# Altium PCB PCB1.PcbDoc (part 1 of 2)
Units mil, origin at the board's own origin, x right, y up, seen from the top; angles counter-clockwise.
Board outline 3551.03 x 3776.23 mil, 2 copper layers (Top Layer, Bottom Layer); 216 components, 234 nets, 1586 pads, 0 vias.
Unrouted connection lines stored in the file: 528.
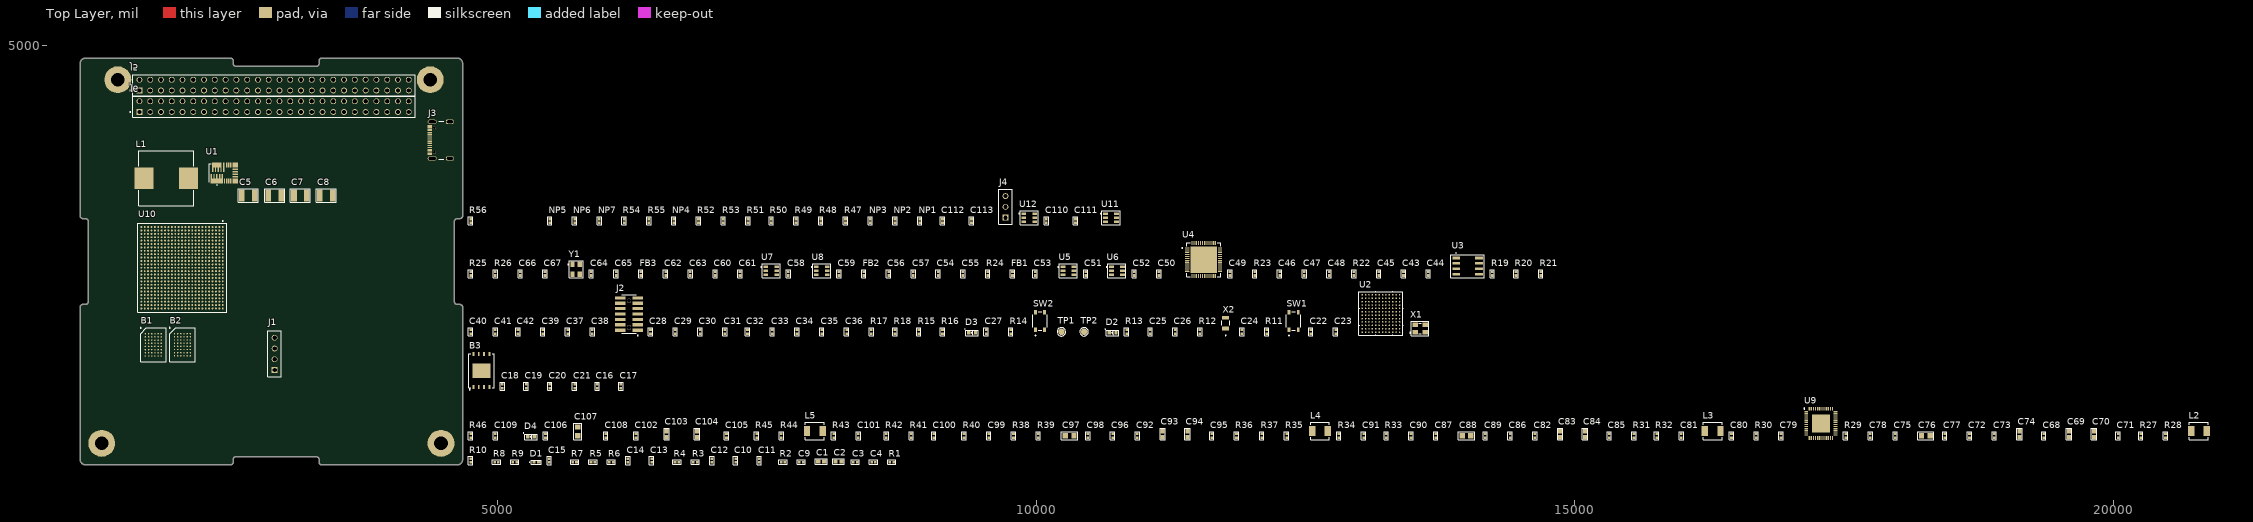
[diagram p0: Top Layer view]
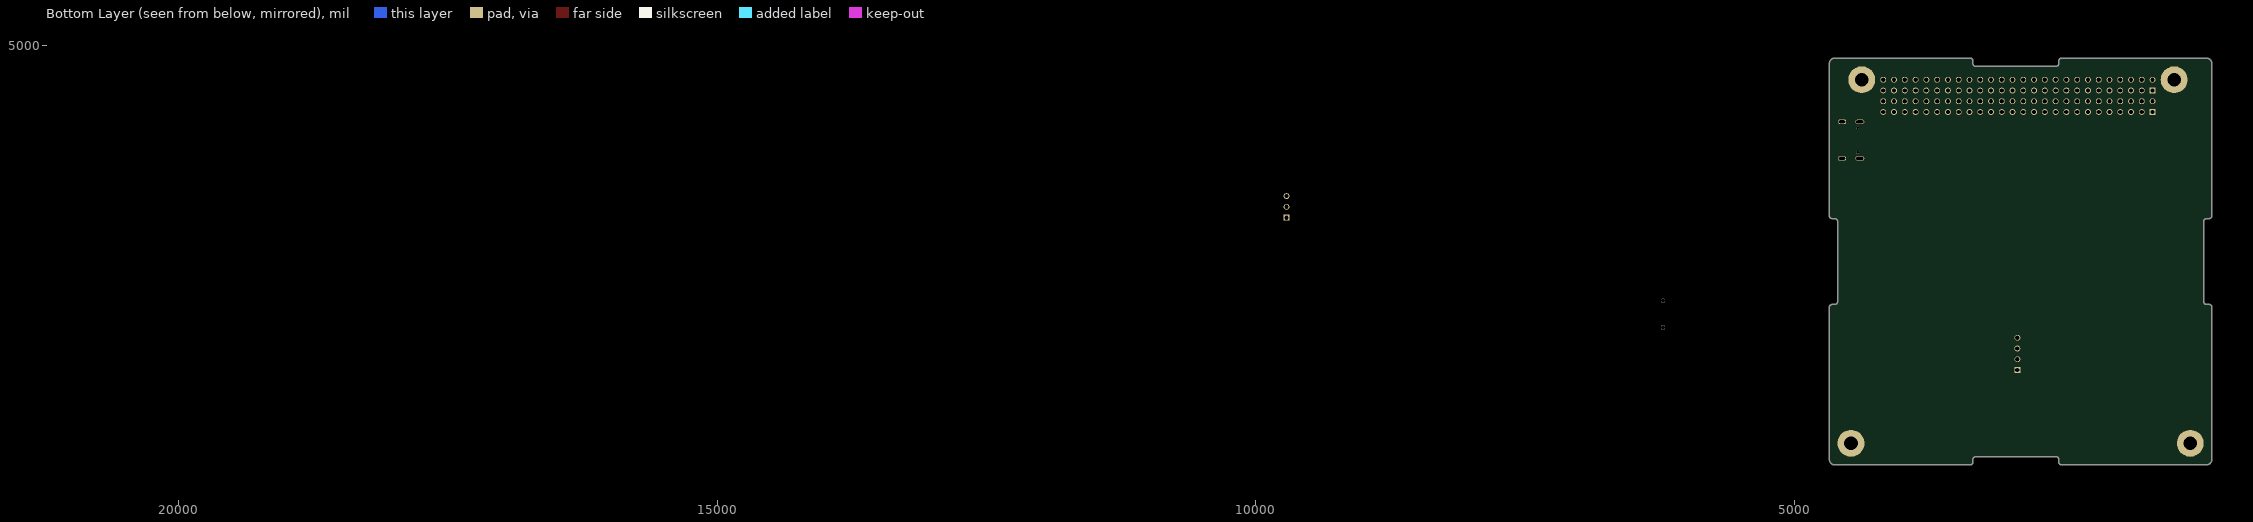
[diagram p1: Bottom Layer view, seen from below]

## Layer stack, top to bottom
Top Solder: solder mask 0.4, Solder Resist, Dk 3.5
Top Layer: signal copper 1.4
Dielectric 1: dielectric 12.6, FR-4, Dk 4.8
Bottom Layer: signal copper 1.4
Bottom Solder: solder mask 0.4, Solder Resist, Dk 3.5

## Board outline
1124.48,1154.99 ccw(c1175,1155) 1175,1104.48 1236.42,1104.48 2519.54,1104.48 2519.7,1104.51 ccw(c2519.54,1130.56) 2545.59,1130.56 2545.59,1155.03 cw(c2570.67,1155.03) 2570.67,1180.1 3317.52,1180.1 cw(c3317.52,1155.03) 3342.6,1155.03 3342.6,1130.56 ccw(c3368.65,1130.56) 3368.49,1104.51 3368.65,1104.49 4625,1104.48 ccw(c4625,1155) 4675.52,1155 4675.51,2568.04 4675.49,2568.2 ccw(c4649.44,2568.04) 4649.44,2594.1 4624.97,2594.1 cw(c4624.97,2619.17) 4599.9,2619.17 4599.9,3366.02 cw(c4624.97,3366.02) 4624.97,3391.1 4649.44,3391.1 ccw(c4649.44,3417.15) 4675.49,3416.99 4675.51,3417.15 4675.52,4830.2 ccw(c4625,4830.2) 4625,4880.71 3368.65,4880.71 3368.49,4880.69 ccw(c3368.65,4854.63) 3342.6,4854.63 3342.6,4830.17 cw(c3317.52,4830.17) 3317.52,4805.1 2570.67,4805.1 cw(c2570.67,4830.17) 2545.59,4830.17 2545.59,4854.63 ccw(c2519.54,4854.63) 2519.7,4880.69 2519.54,4880.71 1175,4880.71 ccw(c1175,4830.2) 1124.48,4830.2 1124.48,3417.15 1124.48,3417.14 ccw(c1150.54,3417.15) 1150.54,3391.1 1175,3391.1 cw(c1175,3366.02) 1200.08,3366.02 1200.08,2619.17 cw(c1175,2619.17) 1175,2594.1 1150.54,2594.1 ccw(c1150.54,2568.04) 1124.49,2568.04

## Design rules (kind name [scope] priority, off if disabled: settings)
Clearance [All] p1: gap=10 ignorepadtopadclearanceinfootprint=FALSE
DiffPairsRouting [All] p1: maxlimit=10 minlimit=10 mostfreqgap=10 toplayer_minwidth=15 toplayer_maxwidth=15 toplayer_prefwidth=15 bottomlayer_minwidth=15 bottomlayer_maxwidth=15 bottomlayer_prefwidth=15 maxuncoupledlength=500
PolygonConnect [All] p1: connectstyle=Relief reliefconductorwidth=10 reliefentries=4 polygonreliefangle="90 Angle" airgapwidth=10
RoutingVias [All] p1: holewidth=28 width=50 viastyle="Through Hole" minholewidth=28 minwidth=50 maxholewidth=28 maxwidth=50
SolderMaskExpansion [All] p1: expansion=0 istentingtop=FALSE
SupplyNets "Schematic Supply Nets_22" [InNet('3.3V_FPGA')] p1: voltage=0.000
SupplyNets "Schematic Supply Nets_21" [InNet('VCC_3.3V')] p2: voltage=0.000
SupplyNets "Schematic Supply Nets_20" [InNet('+5V_CSKB')] p3: voltage=0.000
SupplyNets "Schematic Supply Nets_19" [InNet('VCCINT_1V')] p4: voltage=0.000
SupplyNets "Schematic Supply Nets_18" [InNet('AGND')] p5: voltage=0.000
SupplyNets "Schematic Supply Nets_16" [InNet('VDDDG')] p6: voltage=0.000
SupplyNets "Schematic Supply Nets_15" [InNet('FT232_VPHY_3.3V')] p7: voltage=0.000
SupplyNets "Schematic Supply Nets_14" [InNet('5V')] p8: voltage=0.000
SupplyNets "Schematic Supply Nets_13" [InNet('FT232_VCCD_3.3V')] p9: voltage=0.000
SupplyNets "Schematic Supply Nets_12" [InNet('VDDD')] p10: voltage=0.000
SupplyNets "Schematic Supply Nets_11" [InNet('FT232_VCORE_1.8V')] p11: voltage=0.000
SupplyNets "Schematic Supply Nets_10" [InNet('PD_BUS')] p12: voltage=0.000
SupplyNets "Schematic Supply Nets_9" [InNet('FT232_VCCA_1.8V')] p13: voltage=0.000
SupplyNets "Schematic Supply Nets_8" [InNet('GND')] p14: voltage=0.000
SupplyNets "Schematic Supply Nets_7" [InNet('VDDDA')] p15: voltage=0.000
SupplyNets "Schematic Supply Nets_6" [InNet('1V2_DDR')] p16: voltage=0.000
SupplyNets "Schematic Supply Nets_5" [InNet('FT232_VPLL_3.3V')] p17: voltage=0.000
SupplyNets "Schematic Supply Nets_3" [InNet('1.8V')] p18: voltage=0.000
SupplyNets "Schematic Supply Nets_2" [InNet('2V5_DDR')] p19: voltage=0.000
SupplyNets "Schematic Supply Nets_1" [InNet('3.3V')] p20: voltage=0.000
SupplyNets "Schematic Supply Nets" [InNet('FT232_VREGIN_5V')] p21: voltage=0.000
Width [All] p1: maxlimit=10 minlimit=10 preferedwidth=10
29 further rules are at their usual default settings.

## Classes and differential pairs
net class MCU_D[15..0]: MCU_D0 MCU_D1 MCU_D2 MCU_D3 MCU_D4 MCU_D5 MCU_D6 MCU_D7 MCU_D8 MCU_D9 MCU_D10 MCU_D11 MCU_D12 MCU_D13 MCU_D14 MCU_D15
net class MCU_A[20..0]: MCU_A0 MCU_A1 MCU_A2 MCU_A3 MCU_A4 MCU_A5 MCU_A6 MCU_A7 MCU_A8 MCU_A9 MCU_A10 MCU_A11 MCU_A12 MCU_A13 MCU_A14 MCU_A15 MCU_A16 MCU_A17 MCU_A18 MCU_A19 MCU_A20
net class SRAM_D[31..0]: SRAM_D0 SRAM_D1 SRAM_D2 SRAM_D3 SRAM_D4 SRAM_D5 SRAM_D6 SRAM_D7 SRAM_D8 SRAM_D9 SRAM_D10 SRAM_D11 SRAM_D12 SRAM_D13 SRAM_D14 SRAM_D15 SRAM_D16 SRAM_D17 SRAM_D18 SRAM_D19 SRAM_D20 SRAM_D21 SRAM_D22 SRAM_D23 SRAM_D24 SRAM_D25 SRAM_D26 SRAM_D27 SRAM_D28 SRAM_D29 SRAM_D30 SRAM_D31
net class SRAM_A[20..0]: SRAM_A0 SRAM_A1 SRAM_A2 SRAM_A3 SRAM_A4 SRAM_A5 SRAM_A6 SRAM_A7 SRAM_A8 SRAM_A9 SRAM_A10 SRAM_A11 SRAM_A12 SRAM_A13 SRAM_A14 SRAM_A15 SRAM_A16 SRAM_A17 SRAM_A18 SRAM_A19 SRAM_A20
net class FLASH_IO[3..0]: FLASH_IO0 FLASH_IO1 FLASH_IO2 FLASH_IO3
component class "07 - CONNECTOR_CSKB": C110 C111 C112 C113 J4 J5 J6 NP1 NP2 NP3 NP4 NP5 NP6 NP7 R47 R48 R49 R50 R51 R52 R53 R54 R55 R56 U11 U12
component class "06 - JTAG": C43 C44 C45 C46 C47 C48 C49 C50 C51 C52 C53 C54 C55 C56 C57 C58 C59 C60 C61 C62 C63 C64 C65 C66 C67 FB1 FB2 FB3 J3 R19 R20 R21 R22 R23 R24 R25 R26 U3 U4 U5 U6 U7 U8 Y1
component class "05 - MCU": C22 C23 C24 C25 C26 C27 C28 C29 C30 C31 C32 C33 C34 C35 C36 C37 C38 C39 C40 C41 C42 D2 D3 J1 J2 R11 R12 R13 R14 R15 R16 R17 R18 SW1 SW2 TP1 TP2 U2 X1 X2
component class "04 - SRAM_FLASH": B1 B2 B3 C16 C17 C18 C19 C20 C21
component class "03 - FPGA_POWER": U10
component class "02 - AUX_POWER_SUPPLIES": C68 C69 C70 C71 C72 C73 C74 C75 C76 C77 C78 C79 C80 C81 C82 C83 C84 C85 C86 C87 C88 C89 C90 C91 C92 C93 C94 C95 C96 C97 C98 C99 C100 C101 C102 C103 C104 C105 C106 C107 C108 C109 D4 L2 L3 L4 L5 R27 R28 R29 R30 R31 R32 R33 R34 R35 R36 R37 R38 R39 R40 R41 R42 R43 R44 R45 R46 U9
component class "01 - POWER SUPPLY": C1 C2 C3 C4 C5 C6 C7 C8 C9 C10 C11 C12 C13 C14 C15 D1 L1 R1 R2 R3 R4 R5 R6 R7 R8 R9 R10 U1
differential pair USB: +USB_P -USB_N

## Components (designator, comment, footprint, x,y, rotation, side; value= is the part's Value field where it differs from the comment)
B1 "IS61WV204816ALL-12BLI" BGA48C75P6X8_600X800X120 1804.29,2218.82 r0 top
B2 "IS61WV204816ALL-12BLI" BGA48C75P6X8_600X800X120 2074.29,2219.76 r0 top
B3 "W25N02KVZEIR" SON127P800X600X80-9N 4850,1980 r90 top
C1 "CAP SMD 0603 10uF 10V ±10%" 0603-C-R 8005,1135 r0 top value=10uF
C2 "CAP SMD 0603 10uF 10V ±10%" 0603-C-R 8165,1135 r0 top value=10uF
C3 "GRM155R61E105KA12D" 0402-C-R 8320,1130 r0 top value=1uF
C4 "GRM155R71C104KA88J" 0402-C-R 8490,1130 r0 top
C5 "GRT32EC70J107ME13L" 1210-C-R 2685,3605 r0 top value=100uF
C6 "GRT32EC70J107ME13L" 1210-C-R 2930,3605 r0 top value=100uF
C7 "GRT32EC70J107ME13L" 1210-C-R 3170,3605 r0 top value=100uF
C8 "GRT32EC70J107ME13L" 1210-C-R 3410,3605 r0 top value=100uF
C9 "CGA2B1X7S1C474K050BC" 0402-C-R 7820,1130 r0 top
C10 "GRM155D81C475ME15J" 0402-C-R 7210,1145 r90 top value=4.7uF
C11 "GRM155R71C104KA88J" 0402-C-R 7430,1145 r90 top
C12 "JMK105BJ105KV-F" 0402-C-R 6990,1145 r90 top value=1uF
C13 "GRM155R71C103KA01D" 0402-C-R 6430,1145 r90 top value=0.01uF
C14 "GRM155R71C104KA88J" 0402-C-R 6210,1145 r90 top
C15 "GRM155R71C103KA01D" 0402-C-R 5480,1145 r90 top value=0.01uF
C16 "CAP CER 10UF 6.3V X5R 0402" 0402-C-R 5925,1835 r90 top
C17 "GRM155R71C104KA88J" 0402-C-R 6145,1835 r90 top
C18 "CAP CER 10UF 6.3V X5R 0402" 0402-C-R 5045,1835 r90 top
C19 "GRM155R71C104KA88J" 0402-C-R 5265,1835 r90 top
C20 "CAP CER 10UF 6.3V X5R 0402" 0402-C-R 5485,1835 r90 top
C21 "GRM155R71C104KA88J" 0402-C-R 5715,1835 r90 top
C22 "GRM0225C1E6R8CA03L" 0402-C-R 12550,2340 r90 top value=6.8pF
C23 "GRM0225C1E6R8CA03L" 0402-C-R 12780,2340 r90 top value=6.8pF
C24 "GRM155R61E104KA87D" 0402-C-R 11910,2340 r90 top value=0.1uF
C25 "CC0402BRNPO9BN5R6" 0402-C-R 11060,2340 r90 top value=5.6pF
C26 "CC0402BRNPO9BN5R6" 0402-C-R 11290,2340 r90 top value=5.6pF
C27 "GRM155R61E104KA87D" 0402-C-R 9535,2340 r90 top value=0.1uF
C28 "GRM155R61E104KA87D" 0402-C-R 6420,2340 r90 top value=0.1uF
C29 "GRM155R61E104KA87D" 0402-C-R 6650,2340 r90 top value=0.1uF
C30 "GRM155R61E104KA87D" 0402-C-R 6880,2340 r90 top value=0.1uF
C31 "GRM155R61E104KA87D" 0402-C-R 7110,2340 r90 top value=0.1uF
C32 "GRM155R61E104KA87D" 0402-C-R 7320,2340 r90 top value=0.1uF
C33 "GRM155R61E104KA87D" 0402-C-R 7550,2340 r90 top value=0.1uF
C34 "GRM155R61E104KA87D" 0402-C-R 7780,2340 r90 top value=0.1uF
C35 "GRM155R61E104KA87D" 0402-C-R 8010,2340 r90 top value=0.1uF
C36 "GRM155D81C475ME15J" 0402-C-R 8240,2340 r90 top value=4.7uF
C37 "GRM155R61E104KA87D" 0402-C-R 5650,2340 r90 top value=0.1uF
C38 "JMK105BJ105KV-F" 0402-C-R 5880,2340 r90 top value=1uF
C39 "885012105013" 0402-C-R 5420,2340 r90 top value=2.2uF
C40 "GRM155R61E104KA87D" 0402-C-R 4750,2340 r90 top value=0.1uF
C41 "JMK105BJ105KV-F" 0402-C-R 4980,2340 r90 top value=1uF
C42 "KGM05AR71E103KH" 0402-C-R 5190,2340 r90 top value=10nF
C43 "GRM155R61E104KA87D" 0402-C-R 13410,2880 r90 top value=0.1uF
C44 "GRM155D81C475ME15J" 0402-C-R 13640,2880 r90 top value=4.7uF
C45 "GRM155R61E104KA87D" 0402-C-R 13180,2880 r90 top value=0.1uF
C46 "GRM155R61E104KA87D" 0402-C-R 12260,2880 r90 top value=0.1uF
C47 "GRM155R61E104KA87D" 0402-C-R 12490,2880 r90 top value=0.1uF
C48 "GRM155R61E104KA87D" 0402-C-R 12720,2880 r90 top value=0.1uF
C49 "GRM155R61E104KA87D" 0402-C-R 11800,2880 r90 top value=0.1uF
C50 "KGM05AR71E103KH" 0402-C-R 11140,2880 r90 top value=10nF
C51 "GRM155R61E104KA87D" 0402-C-R 10460,2880 r90 top value=0.1uF
C52 "GRM155R61E104KA87D" 0402-C-R 10910,2880 r90 top value=0.1uF
C53 "GRM155R61E104KA87D" 0402-C-R 9990,2880 r90 top value=0.1uF
C54 "GRM155R61E104KA87D" 0402-C-R 9090,2880 r90 top value=0.1uF
C55 "GRM155D81C475ME15J" 0402-C-R 9320,2880 r90 top value=4.7uF
C56 "GRM155R61E104KA87D" 0402-C-R 8630,2880 r90 top value=0.1uF
C57 "GRM155R61E104KA87D" 0402-C-R 8860,2880 r90 top value=0.1uF
C58 "GRM155R61E104KA87D" 0402-C-R 7700,2880 r90 top value=0.1uF
C59 "GRM155R61E104KA87D" 0402-C-R 8170,2880 r90 top value=0.1uF
C60 "GRM155R61E104KA87D" 0402-C-R 7020,2880 r90 top value=0.1uF
C61 "GRM155D81C475ME15J" 0402-C-R 7250,2880 r90 top value=4.7uF
C62 "GRM155R61E104KA87D" 0402-C-R 6560,2880 r90 top value=0.1uF
C63 "GRM155R61E104KA87D" 0402-C-R 6790,2880 r90 top value=0.1uF
C64 "GRM155D81C475ME15J" 0402-C-R 5870,2880 r90 top value=4.7uF
C65 "GRM155R61E104KA87D" 0402-C-R 6100,2880 r90 top value=0.1uF
C66 "GRM1555C1H180JA01D" 0402-C-R 5210,2880 r90 top value=18pF
C67 "GRM1555C1H180JA01D" 0402-C-R 5440,2880 r90 top value=18pF
C68 "GRM155R71C104KA88J" 0402-C-R 19355,1375 r90 top
C69 "GRM188R61A226ME15D" 0603-C-R 19590,1390 r90 top value=22uF
C70 "GRM188R61A226ME15D" 0603-C-R 19820,1390 r90 top value=22uF
C71 "GCM1555C1H560JA16D" 0402-C-R 20045,1375 r90 top value=56pF
C72 "C1005X5R1A335K050BC" 0402-C-R 18665,1375 r90 top value=3.3uF
C73 "GRM155D81C475ME15J" 0402-C-R 18895,1375 r90 top value=4.7uF
C74 "CAP SMD 0603 10uF 10V ±10%" 0603-C-R 19130,1390 r90 top value=10uF
C75 "GRM1555C1H220JA01D" 0402-C-R 17975,1375 r90 top value=22pF
C76 "C2012X5R1V226M125AC" 0805-C-R 18260,1375 r0 top value=22uF
C77 "GRM155R61E104KA87D" 0402-C-R 18435,1375 r90 top value=0.1uF
C78 "GRM155R71H472KA01D" 0402-C-R 17745,1375 r90 top value=4.7nF
C79 "GRM155D81C475ME15J" 0402-C-R 16915,1375 r90 top value=4.7uF
C80 "GRM155R71C104KA88J" 0402-C-R 16455,1375 r90 top
C81 "GRM155R61E104KA87D" 0402-C-R 15990,1375 r90 top value=0.1uF
C82 "GRM155R71C104KA88J" 0402-C-R 14630,1375 r90 top
C83 "GRM188R61A226ME15D" 0603-C-R 14865,1390 r90 top value=22uF
C84 "GRM188R61A226ME15D" 0603-C-R 15095,1390 r90 top value=22uF
C85 "GCM1555C1H560JA16D" 0402-C-R 15320,1375 r90 top value=56pF
C86 "GRM155R71C104KA88J" 0402-C-R 14400,1375 r90 top
C87 "GRM1555C1H220JA01D" 0402-C-R 13710,1375 r90 top value=22pF
C88 "C2012X5R1V226M125AC" 0805-C-R 13995,1375 r0 top value=22uF
C89 "GRM155R61E104KA87D" 0402-C-R 14170,1375 r90 top value=0.1uF
C90 "GRM155R71H472KA01D" 0402-C-R 13480,1375 r90 top value=4.7nF
C91 "GRM155R71C104KA88J" 0402-C-R 13040,1375 r90 top
C92 "GRM155R71C104KA88J" 0402-C-R 10940,1375 r90 top
C93 "GRM188R61A226ME15D" 0603-C-R 11175,1390 r90 top value=22uF
C94 "GRM188R61A226ME15D" 0603-C-R 11405,1390 r90 top value=22uF
C95 "GCM1555C1H560JA16D" 0402-C-R 11630,1375 r90 top value=56pF
C96 "GRM1555C1H220JA01D" 0402-C-R 10710,1375 r90 top value=22pF
C97 "C2012X5R1V226M125AC" 0805-C-R 10310,1375 r0 top value=22uF
C98 "GRM155R61E104KA87D" 0402-C-R 10480,1375 r90 top value=0.1uF
C99 "GRM155R71H472KA01D" 0402-C-R 9560,1375 r90 top value=4.7nF
C100 "GRM155R71C104KA88J" 0402-C-R 9050,1375 r90 top
C101 "GRM1555C1H5R0BA01D" 0402-C-R 8350,1375 r90 top value=5pF
C102 "GRM155R71C104KA88J" 0402-C-R 6285,1375 r90 top
C103 "GRM188R61A226ME15D" 0603-C-R 6570,1390 r90 top value=22uF
C104 "GRM188R61A226ME15D" 0603-C-R 6850,1390 r90 top value=22uF
C105 "GCM1555C1H560JA16D" 0402-C-R 7125,1375 r90 top value=56pF
C106 "GRM1555C1H220JA01D" 0402-C-R 5445,1375 r90 top value=22pF
C107 "C2012X5R1V226M125AC" 0805-C-R 5745,1415 r90 top value=22uF
C108 "GRM155R61E104KA87D" 0402-C-R 6005,1375 r90 top value=0.1uF
C109 "GRM155R71H472KA01D" 0402-C-R 4980,1375 r90 top value=4.7nF
C110 "GRM155R61E104KA87D" 0402-C-R 10095,3370 r90 top value=0.1uF
C111 "GRM155R61E104KA87D" 0402-C-R 10365,3370 r90 top value=0.1uF
C112 "GRM155R61E104KA87D" 0402-C-R 9130,3370 r90 top value=0.1uF
C113 "GRM155R61E104KA87D" 0402-C-R 9400,3370 r90 top value=0.1uF
D1 "LNJ347W83RA" LED_0402 5360,1130 r0 top
D2 "150060GS75000" LED0603 10710,2330 r0 top
D3 "150060GS75000" LED0603 9405,2330 r0 top
D4 "150060GS75000" LED0603 5310,1365 r0 top
FB1 "BLM15HD182SN1D" 0402-F-R 9780,2880 r90 top
FB2 "BLM15HD182SN1D" 0402-F-R 8400,2880 r90 top
FB3 "BLM15HD182SN1D" 0402-F-R 6330,2880 r90 top
J1 "OLED DISPLAY" OLED_DISPLAY 2930,1985 r0 top
J2 "CONN HEADER SMD 14POS 1.27MM_1" SAMTEC_FTSH-107-01-L-DV-K-A 6220,2505 r90 top
J3 "CONN RCP USB2.0 TYP C 24P SMD RA" GCT_USB4105-GF-A 4557.2,4119.84 r90 top
J4 "CONN PTH 3PIN" "CONNECTOR BATTERY" 9715,3400 r90 top
J5 "ESQ-126-39-G-D" SAMTEC_ESQ-126-39-G-D 1675,4580.2 r180 top locked
J6 "ESQ-126-39-G-D" SAMTEC_ESQ-126-39-G-D 1675,4380.2 r180 top locked
L1 "744355147" WE-HCI_1365 1925,3765 r0 top value=470nH
L2 "IND 2.2UH 4A 61 MOHM SMD" IND_SRP4020TA-2R2M 20795,1420 r0 top value=2.2uH
L3 "IND 2.2UH 4A 61 MOHM SMD" IND_SRP4020TA-2R2M 16280,1420 r0 top value=2.2uH
L4 "IND 2.2UH 4A 61 MOHM SMD" IND_SRP4020TA-2R2M 12635,1420 r0 top value=2.2uH
L5 "IND 2.2UH 4A 61 MOHM SMD" IND_SRP4020TA-2R2M 7945,1420 r0 top value=2.2uH
NP1 "NP" 0402-R-NP 8920,3370 r90 top
NP2 "NP" 0402-R-NP 8690,3370 r90 top
NP3 "NP" 0402-R-NP 8460,3370 r90 top
NP4 "NP" 0402-R-NP 6635,3370 r90 top
NP5 "NP" 0402-R-NP 5485,3370 r90 top
NP6 "NP" 0402-R-NP 5715,3370 r90 top
NP7 "NP" 0402-R-NP 5945,3370 r90 top
R1 "RMCF0402ZT0R00" 0402-R-R 8660,1130 r0 top value=0R
R2 "RC0402FR-072R2L" 0402-R-R 7650,1130 r0 top value=2.2R
R3 "RC0402FR-0710KL" 0402-R-R 6835,1130 r0 top value=10K
R4 "RMCF0402FT4K99" 0402-R-R 6665,1130 r0 top
R5 "RMCF0402FT4K99" 0402-R-R 5885,1130 r0 top
R6 "RMCF0402ZT0R00" 0402-R-R 6055,1130 r0 top value=0R
R7 "RC0402FR-0710KL" 0402-R-R 5715,1130 r0 top value=10K
R8 "CRCW0402200RFKED" 0402-R-R 4990,1130 r0 top value=200R
R9 "RC0402FR-072R2L" 0402-R-R 5160,1130 r0 top value=309R
R10 "RMCF0402ZT0R00" 0402-R-R 4750,1145 r90 top value=0R
R11 "RC0402FR-07560RL" 0402-R-R 12140,2340 r90 top value=10K
R12 "RC0402FR-0710KL" 0402-R-R 11520,2340 r90 top value=10K
R13 "RC0402FR-07560RL" 0402-R-R 10840,2340 r90 top value=10K
R14 "RC0402FR-0710KL" 0402-R-R 9765,2340 r90 top value=10K
R15 "RC0402FR-071KL" 0402-R-R 8910,2340 r90 top value=1K
R16 "RC0402FR-071KL" 0402-R-R 9130,2340 r90 top value=1K
R17 "RC0402FR-071KL" 0402-R-R 8470,2340 r90 top value=1K
R18 "RC0402FR-071KL" 0402-R-R 8690,2340 r90 top value=1K
R19 "RC0402FR-0710KL" 0402-R-R 14235,2880 r90 top value=10K
R20 "RC0402FR-0710KL" 0402-R-R 14455,2880 r90 top value=10K
R21 "RC0402FR-0710KL" 0402-R-R 14685,2880 r90 top value=10K
R22 "RMCF0402FT2K00" 0402-R-R 12950,2880 r90 top value=2K
R23 "RC0402FR-0710KL" 0402-R-R 12030,2880 r90 top value=10K
R24 "RMCF0402FT12K0" 0402-R-R 9550,2880 r90 top value=12K
R25 "RMCF0402FT5K10" 0402-R-R 4750,2880 r90 top value=5.1K
R26 "RMCF0402FT5K10" 0402-R-R 4980,2880 r90 top value=5.1K
R27 "ERA-2AEB753X" 0402-R-R 20255,1375 r90 top
R28 "ERJ-2RKF1502X" 0402-R-R 20485,1375 r90 top value=15k
R29 "RT0402BRD0724KL" 0402-R-R 17515,1375 r90 top
R30 "RC0402JR-0710KL" 0402-R-R 16685,1375 r90 top
R31 "ERA-2AEB753X" 0402-R-R 15550,1375 r90 top
R32 "ERJ-2RKF1502X" 0402-R-R 15760,1375 r90 top value=15k
R33 "RT0402BRD0724KL" 0402-R-R 13250,1375 r90 top
R34 "RMCF0402ZT0R00" 0402-R-R 12810,1375 r90 top value=0R
R35 "RC0402FR-0710KL" 0402-R-R 12325,1375 r90 top value=10K
R36 "ERJ-2RKF5102X" 0402-R-R 11860,1375 r90 top
R37 "ERJ-2RKF1502X" 0402-R-R 12095,1375 r90 top value=15k
R38 "RC0402FR-0710KL" 0402-R-R 9790,1375 r90 top value=10K
R39 "RMCF0402ZT0R00" 0402-R-R 10020,1375 r90 top value=0R
R40 "RT0402BRD0724KL" 0402-R-R 9330,1375 r90 top
R41 "RC0402JR-0710KL" 0402-R-R 8840,1375 r90 top
R42 "RC0402FR-07374KL" 0402-R-R 8610,1375 r90 top
R43 "RC0402FR-0710KL" 0402-R-R 8120,1375 r90 top value=10K
R44 "ERJ-2RKF1502X" 0402-R-R 7635,1375 r90 top value=15k
R45 "RC0402JR-0710KL" 0402-R-R 7405,1375 r90 top
R46 "ERJ-2RKF2002X" 0402-R-R 4750,1375 r90 top
R47 "RMCF0402FT100K" 0402-R-R 8230,3370 r90 top value=100K
R48 "RMCF0402FT100K" 0402-R-R 8000,3370 r90 top value=100K
R49 "RC0402FR-072R2L" 0402-R-R 7770,3370 r90 top value=2.2R
R50 "RMCF0402ZT0R00" 0402-R-R 7540,3370 r90 top value=0R
R51 "RMCF0402ZT0R00" 0402-R-R 7325,3370 r90 top value=0R
R52 "RMCF0402FT10K0" 0402-R-R 6865,3370 r90 top value=10K
R53 "RMCF0402FT10K0" 0402-R-R 7095,3370 r90 top value=10K
R54 "RMCF0402ZT0R00" 0402-R-R 6175,3370 r90 top value=0R
R55 "RMCF0402ZT0R00" 0402-R-R 6405,3370 r90 top value=0R
R56 "RMCF0402FT10K0" 0402-R-R 4750,3370 r90 top value=10K
SW1 "SKRPADE010" SKRPADE010_AAL 12390,2440 r90 top
SW2 "SKRPADE010" SKRPADE010_AAL 10035,2440 r90 top
TP1 "5001" TEST_POINT 10235,2340 r0 top
TP2 "5001" TEST_POINT 10445,2340 r0 top
U1 "MAX20810AFE+" MAX20810AFE 2450,3815 r90 top
U2 "IC MCU 32BIT 2MB FLASH 144UFBGA" UFBGA144-10x10mm 13200,2510 r0 top
U3 "93LC56B-E/SN" 93LC56B-E/SN 14005,2950 r0 top
U4 "IC HS USB TO UART/FIFO 48QFN" FT232HQ 11555,3010 r0 top
U5 "SN74AXC1T45DBVR" SN74AXC1T45DBVR 10300,2905 r0 top
U6 "SN74AXC1T45DBVR" SN74AXC1T45DBVR 10750,2905 r0 top
U7 "SN74AXC1T45DBVR" SN74AXC1T45DBVR 7540,2905 r0 top
U8 "SN74AXC1T45DBVR" SN74AXC1T45DBVR 8010,2905 r0 top
U9 "TPS65400RGZR" QFN50P700X700X100-49N-D 17285,1490 r0 top
U10 "IC FPGA 304 I/O 625-BGA/FCBGA" BGA625C80P25X25_2100X2100X192 2070.51,2934.53 r270 top
U11 "SN74AXC1T45DBVR" SN74AXC1T45DBVR 10695,3400 r0 top
U12 "SN74AXC1T45DBVR" SN74AXC1T45DBVR 9935,3400 r0 top
X1 "STDCRG1-16M" XTAL_ECS-160-8-33Q-JES-TR 13565,2370 r0 top value="16 MHz"
X2 "STDMUA14-32.768K" "XTAL_NX3215SA_NDK-M - duplicate" 11760,2420 r90 top value="32.768 kHz"
Y1 "ABM8-12.000MHZ-B2-T" XTAL_ABM8-12.000MHZ-B2-T 5730,2920 r0 top

## Footprints (in the part's own frame and the unit in brackets; to place one, negate y for a bottom-side part, rotate by r counter-clockwise, add the part's x,y. Pads: shape width x height; smd on the part's side, far side on the other; paste and mask are expansions set on the pad)
93LC56B-E/SN [mm] "done"
  rect 1.8x0.6 smd paste+0 mask+0: 1(-2.7,1.905) 2(-2.7,0.635) 3(-2.7,-0.635) 4(-2.7,-1.905) 5(2.7,-1.905) 6(2.7,-0.635) 7(2.7,0.635) 8(2.7,1.905)
  silkscreen extent -3.94,-2.69 3.94,3.19, body extent -3,-2.45 3,2.45, height 1.76
0402-C-R [mm]
  rect 0.62x0.62 smd: 1(-0.45,0) 2(0.45,0)
  silkscreen extent -0.97,-0.51 0.97,0.51, body extent -0.52,-0.27 0.53,0.28, height 0.55
0402-F-R [mm]
  rect 0.62x0.62 smd: 1(-0.45,0) 2(0.45,0)
  silkscreen extent -0.97,-0.51 0.97,0.51, body extent -0.5,-0.25 0.5,0.25, height 0.5
0402-R-NP [mm]
  rect 0.62x0.62 smd: 1(-0.45,0) 2(0.45,0)
  silkscreen extent -0.97,-0.51 0.97,0.51
0402-R-R [mm]
  rect 0.62x0.62 smd: 1(-0.45,0) 2(0.45,0)
  silkscreen extent -0.97,-0.51 0.97,0.51, body extent -0.5,-0.25 0.5,0.25, height 0.35
0603-C-R [mm]
  rect 1.01x0.93 smd: 1(-0.709,0) 2(0.709,0)
  silkscreen extent -1.38,-0.63 1.38,0.63, body extent -0.8,-0.4 0.8,0.4, height 1
0805-C-R [mil]
  rect 48x50 smd: 1(-40,0) 2(40,0)
  silkscreen extent -75,-38 75,38, body extent -38,-24 40,25, height 31
1210-C-R [mm]
  rect 1.3x2.81 smd: 1(-1.524,0) 2(1.524,0)
  silkscreen extent -2.35,-1.59 2.35,1.6, body extent -1.6,-1.25 1.6,1.25, height 2.8
BGA48C75P6X8_600X800X120 [mm]
  round 0.33 smd: A1(-1.875,2.625) A2(-1.125,2.625) A3(-0.375,2.625) A4(0.375,2.625) A5(1.125,2.625) A6(1.875,2.625) B1(-1.875,1.875) B2(-1.125,1.875) B3(-0.375,1.875) B4(0.375,1.875) B5(1.125,1.875) B6(1.875,1.875) C1(-1.875,1.125) C2(-1.125,1.125) C3(-0.375,1.125) C4(0.375,1.125) C5(1.125,1.125) C6(1.875,1.125) D1(-1.875,0.375) D2(-1.125,0.375) D3(-0.375,0.375) D4(0.375,0.375) D5(1.125,0.375) D6(1.875,0.375) E1(-1.875,-0.375) E2(-1.125,-0.375) E3(-0.375,-0.375) E4(0.375,-0.375) E5(1.125,-0.375) E6(1.875,-0.375) F1(-1.875,-1.125) F2(-1.125,-1.125) F3(-0.375,-1.125) F4(0.375,-1.125) F5(1.125,-1.125) F6(1.875,-1.125) G1(-1.875,-1.875) G2(-1.125,-1.875) G3(-0.375,-1.875) G4(0.375,-1.875) G5(1.125,-1.875) G6(1.875,-1.875) H1(-1.875,-2.625) H2(-1.125,-2.625) H3(-0.375,-2.625) H4(0.375,-2.625) H5(1.125,-2.625) H6(1.875,-2.625)
  silkscreen extent -3.1,-4 3,4.1, body extent -3,-4 3,4, height 1.2
BGA625C80P25X25_2100X2100X192 [mm]
  round 0.45 smd paste+0 mask+0.102: A1(-9.6,9.6) A2(-8.8,9.6) A3(-8,9.6) A4(-7.2,9.6) A5(-6.4,9.6) A6(-5.6,9.6) A7(-4.8,9.6) A8(-4,9.6) A9(-3.2,9.6) A10(-2.4,9.6) A11(-1.6,9.6) A12(-0.8,9.6) A13(0,9.6) A14(0.8,9.6) A15(1.6,9.6) A16(2.4,9.6) A17(3.2,9.6) A18(4,9.6) A19(4.8,9.6) A20(5.6,9.6) A21(6.4,9.6) A22(7.2,9.6) A23(8,9.6) A24(8.8,9.6) A25(9.6,9.6) AA1(-9.6,-6.4) AA2(-8.8,-6.4) AA3(-8,-6.4) AA4(-7.2,-6.4) AA5(-6.4,-6.4) AA6(-5.6,-6.4) AA7(-4.8,-6.4) AA8(-4,-6.4) AA9(-3.2,-6.4) AA10(-2.4,-6.4) AA11(-1.6,-6.4) AA12(-0.8,-6.4) AA13(0,-6.4) AA14(0.8,-6.4) AA15(1.6,-6.4) AA16(2.4,-6.4) AA17(3.2,-6.4) AA18(4,-6.4) AA19(4.8,-6.4) AA20(5.6,-6.4) AA21(6.4,-6.4) AA22(7.2,-6.4) AA23(8,-6.4) AA24(8.8,-6.4) AA25(9.6,-6.4) AB1(-9.6,-7.2) AB2(-8.8,-7.2) AB3(-8,-7.2) AB4(-7.2,-7.2) AB5(-6.4,-7.2) AB6(-5.6,-7.2) AB7(-4.8,-7.2) AB8(-4,-7.2) AB9(-3.2,-7.2) AB10(-2.4,-7.2) AB11(-1.6,-7.2) AB12(-0.8,-7.2) AB13(0,-7.2) AB14(0.8,-7.2) AB15(1.6,-7.2) AB16(2.4,-7.2) AB17(3.2,-7.2) AB18(4,-7.2) AB19(4.8,-7.2) AB20(5.6,-7.2) AB21(6.4,-7.2) AB22(7.2,-7.2) AB23(8,-7.2) AB24(8.8,-7.2) AB25(9.6,-7.2) AC1(-9.6,-8) AC2(-8.8,-8) AC3(-8,-8) AC4(-7.2,-8) AC5(-6.4,-8) AC6(-5.6,-8) AC7(-4.8,-8) AC8(-4,-8) AC9(-3.2,-8) AC10(-2.4,-8) AC11(-1.6,-8) AC12(-0.8,-8) AC13(0,-8) AC14(0.8,-8) AC15(1.6,-8) AC16(2.4,-8) AC17(3.2,-8) AC18(4,-8) AC19(4.8,-8) AC20(5.6,-8) AC21(6.4,-8) AC22(7.2,-8) AC23(8,-8) AC24(8.8,-8) AC25(9.6,-8) AD1(-9.6,-8.8) AD2(-8.8,-8.8) AD3(-8,-8.8) AD4(-7.2,-8.8) AD5(-6.4,-8.8) AD6(-5.6,-8.8) AD7(-4.8,-8.8) AD8(-4,-8.8) AD9(-3.2,-8.8) AD10(-2.4,-8.8) AD11(-1.6,-8.8) AD12(-0.8,-8.8) AD13(0,-8.8) AD14(0.8,-8.8) AD15(1.6,-8.8) AD16(2.4,-8.8) AD17(3.2,-8.8) AD18(4,-8.8) AD19(4.8,-8.8) AD20(5.6,-8.8) AD21(6.4,-8.8) AD22(7.2,-8.8) AD23(8,-8.8) AD24(8.8,-8.8) AD25(9.6,-8.8) AE1(-9.6,-9.6) AE2(-8.8,-9.6) AE3(-8,-9.6) AE4(-7.2,-9.6) AE5(-6.4,-9.6) AE6(-5.6,-9.6) AE7(-4.8,-9.6) AE8(-4,-9.6) AE9(-3.2,-9.6) AE10(-2.4,-9.6) AE11(-1.6,-9.6) AE12(-0.8,-9.6) AE13(0,-9.6) AE14(0.8,-9.6) AE15(1.6,-9.6) AE16(2.4,-9.6) AE17(3.2,-9.6) AE18(4,-9.6) AE19(4.8,-9.6) AE20(5.6,-9.6) AE21(6.4,-9.6) AE22(7.2,-9.6) AE23(8,-9.6) AE24(8.8,-9.6) AE25(9.6,-9.6) B1(-9.6,8.8) B2(-8.8,8.8) B3(-8,8.8) B4(-7.2,8.8) B5(-6.4,8.8) B6(-5.6,8.8) B7(-4.8,8.8) B8(-4,8.8) B9(-3.2,8.8) B10(-2.4,8.8) B11(-1.6,8.8) B12(-0.8,8.8) B13(0,8.8) B14(0.8,8.8) B15(1.6,8.8) B16(2.4,8.8) B17(3.2,8.8) B18(4,8.8) B19(4.8,8.8) B20(5.6,8.8) B21(6.4,8.8) B22(7.2,8.8) B23(8,8.8) B24(8.8,8.8) B25(9.6,8.8) C1(-9.6,8) C2(-8.8,8) C3(-8,8) C4(-7.2,8) C5(-6.4,8) C6(-5.6,8) C7(-4.8,8) C8(-4,8) C9(-3.2,8) C10(-2.4,8) C11(-1.6,8) C12(-0.8,8) C13(0,8) C14(0.8,8) C15(1.6,8) C16(2.4,8) C17(3.2,8) C18(4,8) C19(4.8,8) C20(5.6,8) C21(6.4,8) C22(7.2,8) C23(8,8) C24(8.8,8) C25(9.6,8) D1(-9.6,7.2) D2(-8.8,7.2) D3(-8,7.2) D4(-7.2,7.2) D5(-6.4,7.2) D6(-5.6,7.2) D7(-4.8,7.2) D8(-4,7.2) D9(-3.2,7.2) D10(-2.4,7.2) D11(-1.6,7.2) D12(-0.8,7.2) D13(0,7.2) D14(0.8,7.2) D15(1.6,7.2) D16(2.4,7.2) D17(3.2,7.2) D18(4,7.2) D19(4.8,7.2) D20(5.6,7.2) D21(6.4,7.2) D22(7.2,7.2) D23(8,7.2) D24(8.8,7.2) D25(9.6,7.2) E1(-9.6,6.4) E2(-8.8,6.4) E3(-8,6.4) E4(-7.2,6.4) E5(-6.4,6.4) E6(-5.6,6.4) E7(-4.8,6.4) E8(-4,6.4) E9(-3.2,6.4) E10(-2.4,6.4) E11(-1.6,6.4) E12(-0.8,6.4) E13(0,6.4) E14(0.8,6.4) E15(1.6,6.4) E16(2.4,6.4) E17(3.2,6.4) E18(4,6.4) E19(4.8,6.4) E20(5.6,6.4) E21(6.4,6.4) E22(7.2,6.4) E23(8,6.4) E24(8.8,6.4) E25(9.6,6.4) F1(-9.6,5.6) F2(-8.8,5.6) F3(-8,5.6) F4(-7.2,5.6) F5(-6.4,5.6) F6(-5.6,5.6) F7(-4.8,5.6) F8(-4,5.6) F9(-3.2,5.6) F10(-2.4,5.6) F11(-1.6,5.6) F12(-0.8,5.6) F13(0,5.6) F14(0.8,5.6) F15(1.6,5.6) F16(2.4,5.6) F17(3.2,5.6) F18(4,5.6) F19(4.8,5.6) F20(5.6,5.6) F21(6.4,5.6) F22(7.2,5.6) F23(8,5.6) F24(8.8,5.6) F25(9.6,5.6) G1(-9.6,4.8) G2(-8.8,4.8) G3(-8,4.8) G4(-7.2,4.8) G5(-6.4,4.8) G6(-5.6,4.8) G7(-4.8,4.8) G8(-4,4.8) G9(-3.2,4.8) G10(-2.4,4.8) G11(-1.6,4.8) G12(-0.8,4.8) G13(0,4.8) G14(0.8,4.8) G15(1.6,4.8) G16(2.4,4.8) G17(3.2,4.8) G18(4,4.8) G19(4.8,4.8) G20(5.6,4.8) G21(6.4,4.8) G22(7.2,4.8) G23(8,4.8) G24(8.8,4.8) G25(9.6,4.8) H1(-9.6,4) H2(-8.8,4) H3(-8,4) H4(-7.2,4) H5(-6.4,4) H6(-5.6,4) H7(-4.8,4) H8(-4,4) H9(-3.2,4) H10(-2.4,4) H11(-1.6,4) H12(-0.8,4) H13(0,4) H14(0.8,4) H15(1.6,4) H16(2.4,4) H17(3.2,4) H18(4,4) H19(4.8,4) H20(5.6,4) H21(6.4,4) H22(7.2,4) H23(8,4) H24(8.8,4) H25(9.6,4) J1(-9.6,3.2) J2(-8.8,3.2) J3(-8,3.2) J4(-7.2,3.2) J5(-6.4,3.2) J6(-5.6,3.2) J7(-4.8,3.2) J8(-4,3.2) J9(-3.2,3.2) J10(-2.4,3.2) J11(-1.6,3.2) J12(-0.8,3.2) J13(0,3.2) J14(0.8,3.2) J15(1.6,3.2) J16(2.4,3.2) J17(3.2,3.2) J18(4,3.2) J19(4.8,3.2) J20(5.6,3.2) J21(6.4,3.2) J22(7.2,3.2) J23(8,3.2) J24(8.8,3.2) J25(9.6,3.2) K1(-9.6,2.4) K2(-8.8,2.4) K3(-8,2.4) K4(-7.2,2.4) K5(-6.4,2.4) K6(-5.6,2.4) K7(-4.8,2.4) K8(-4,2.4) K9(-3.2,2.4) K10(-2.4,2.4) K11(-1.6,2.4) K12(-0.8,2.4) K13(0,2.4) K14(0.8,2.4) K15(1.6,2.4) K16(2.4,2.4) K17(3.2,2.4) K18(4,2.4) K19(4.8,2.4) K20(5.6,2.4) K21(6.4,2.4) K22(7.2,2.4) K23(8,2.4) K24(8.8,2.4) K25(9.6,2.4) L1(-9.6,1.6) L2(-8.8,1.6) L3(-8,1.6) L4(-7.2,1.6) L5(-6.4,1.6) L6(-5.6,1.6) L7(-4.8,1.6) L8(-4,1.6) L9(-3.2,1.6) L10(-2.4,1.6) L11(-1.6,1.6) L12(-0.8,1.6) L13(0,1.6) L14(0.8,1.6) L15(1.6,1.6) L16(2.4,1.6) L17(3.2,1.6) L18(4,1.6) L19(4.8,1.6) L20(5.6,1.6) L21(6.4,1.6) L22(7.2,1.6) L23(8,1.6) L24(8.8,1.6) L25(9.6,1.6) M1(-9.6,0.8) M2(-8.8,0.8) M3(-8,0.8) M4(-7.2,0.8) M5(-6.4,0.8) M6(-5.6,0.8) M7(-4.8,0.8) M8(-4,0.8) M9(-3.2,0.8) M10(-2.4,0.8) M11(-1.6,0.8) M12(-0.8,0.8) M13(0,0.8) M14(0.8,0.8) M15(1.6,0.8) M16(2.4,0.8) M17(3.2,0.8) M18(4,0.8) M19(4.8,0.8) M20(5.6,0.8) M21(6.4,0.8) M22(7.2,0.8) M23(8,0.8) M24(8.8,0.8) M25(9.6,0.8) N1(-9.6,0) N2(-8.8,0) N3(-8,0) N4(-7.2,0) N5(-6.4,0) N6(-5.6,0) N7(-4.8,0) N8(-4,0) N9(-3.2,0) N10(-2.4,0) N11(-1.6,0) N12(-0.8,0) N13(0,0) N14(0.8,0) N15(1.6,0) N16(2.4,0) N17(3.2,0) N18(4,0) N19(4.8,0) N20(5.6,0) N21(6.4,0) N22(7.2,0) N23(8,0) N24(8.8,0) N25(9.6,0) P1(-9.6,-0.8) P2(-8.8,-0.8) P3(-8,-0.8) P4(-7.2,-0.8) P5(-6.4,-0.8) P6(-5.6,-0.8) P7(-4.8,-0.8) P8(-4,-0.8) P9(-3.2,-0.8) P10(-2.4,-0.8) P11(-1.6,-0.8) P12(-0.8,-0.8) P13(0,-0.8) P14(0.8,-0.8) P15(1.6,-0.8) P16(2.4,-0.8) P17(3.2,-0.8) P18(4,-0.8) P19(4.8,-0.8) P20(5.6,-0.8) P21(6.4,-0.8) P22(7.2,-0.8) P23(8,-0.8) P24(8.8,-0.8) P25(9.6,-0.8) R1(-9.6,-1.6) R2(-8.8,-1.6) R3(-8,-1.6) R4(-7.2,-1.6) R5(-6.4,-1.6) R6(-5.6,-1.6) R7(-4.8,-1.6) R8(-4,-1.6) R9(-3.2,-1.6) R10(-2.4,-1.6) R11(-1.6,-1.6) R12(-0.8,-1.6) R13(0,-1.6) R14(0.8,-1.6) R15(1.6,-1.6) R16(2.4,-1.6) R17(3.2,-1.6) R18(4,-1.6) R19(4.8,-1.6) R20(5.6,-1.6) R21(6.4,-1.6) R22(7.2,-1.6) R23(8,-1.6) R24(8.8,-1.6) R25(9.6,-1.6) T1(-9.6,-2.4) T2(-8.8,-2.4) T3(-8,-2.4) T4(-7.2,-2.4) T5(-6.4,-2.4) T6(-5.6,-2.4) T7(-4.8,-2.4) T8(-4,-2.4) T9(-3.2,-2.4) T10(-2.4,-2.4) T11(-1.6,-2.4) T12(-0.8,-2.4) T13(0,-2.4) T14(0.8,-2.4) T15(1.6,-2.4) T16(2.4,-2.4) T17(3.2,-2.4) T18(4,-2.4) T19(4.8,-2.4) T20(5.6,-2.4) T21(6.4,-2.4) T22(7.2,-2.4) T23(8,-2.4) T24(8.8,-2.4) T25(9.6,-2.4) U1(-9.6,-3.2) U2(-8.8,-3.2) U3(-8,-3.2) U4(-7.2,-3.2) U5(-6.4,-3.2) U6(-5.6,-3.2) U7(-4.8,-3.2) U8(-4,-3.2) U9(-3.2,-3.2) U10(-2.4,-3.2) U11(-1.6,-3.2) U12(-0.8,-3.2) U13(0,-3.2) U14(0.8,-3.2) U15(1.6,-3.2) U16(2.4,-3.2) U17(3.2,-3.2) U18(4,-3.2) U19(4.8,-3.2) U20(5.6,-3.2) U21(6.4,-3.2) U22(7.2,-3.2) U23(8,-3.2) U24(8.8,-3.2) U25(9.6,-3.2) V1(-9.6,-4) V2(-8.8,-4) V3(-8,-4) V4(-7.2,-4) V5(-6.4,-4) V6(-5.6,-4) V7(-4.8,-4) V8(-4,-4) V9(-3.2,-4) V10(-2.4,-4) V11(-1.6,-4) V12(-0.8,-4) V13(0,-4) V14(0.8,-4) V15(1.6,-4) V16(2.4,-4) V17(3.2,-4) V18(4,-4) V19(4.8,-4) V20(5.6,-4) V21(6.4,-4) V22(7.2,-4) V23(8,-4) V24(8.8,-4) V25(9.6,-4) W1(-9.6,-4.8) W2(-8.8,-4.8) W3(-8,-4.8) W4(-7.2,-4.8) W5(-6.4,-4.8) W6(-5.6,-4.8) W7(-4.8,-4.8) W8(-4,-4.8) W9(-3.2,-4.8) W10(-2.4,-4.8) W11(-1.6,-4.8) W12(-0.8,-4.8) W13(0,-4.8) W14(0.8,-4.8) W15(1.6,-4.8) W16(2.4,-4.8) W17(3.2,-4.8) W18(4,-4.8) W19(4.8,-4.8) W20(5.6,-4.8) W21(6.4,-4.8) W22(7.2,-4.8) W23(8,-4.8) W24(8.8,-4.8) W25(9.6,-4.8) Y1(-9.6,-5.6) Y2(-8.8,-5.6) Y3(-8,-5.6) Y4(-7.2,-5.6) Y5(-6.4,-5.6) Y6(-5.6,-5.6) Y7(-4.8,-5.6) Y8(-4,-5.6) Y9(-3.2,-5.6) Y10(-2.4,-5.6) Y11(-1.6,-5.6) Y12(-0.8,-5.6) Y13(0,-5.6) Y14(0.8,-5.6) Y15(1.6,-5.6) Y16(2.4,-5.6) Y17(3.2,-5.6) Y18(4,-5.6) Y19(4.8,-5.6) Y20(5.6,-5.6) Y21(6.4,-5.6) Y22(7.2,-5.6) Y23(8,-5.6) Y24(8.8,-5.6) Y25(9.6,-5.6)
  silkscreen extent -11.1,-10.5 10.5,10.5, body extent -10.5,-10.5 10.5,10.5, height 2.99
"CONNECTOR BATTERY" [mm]
  rect 1.37x1.37 hole 1.02: 1(0,0)
  round 1.37 hole 1.02: 2(2.54,0) 3(5.08,0)
  silkscreen extent -1.6,-1.6 6.68,1.6
FT232HQ [mm] "done"
  rrect25% 0.96x0.27 smd: 1(-3.875,2.75) 2(-3.875,2.25) 3(-3.875,1.75) 4(-3.875,1.25) 5(-3.875,0.75) 6(-3.875,0.25) 7(-3.875,-0.25) 8(-3.875,-0.75) 9(-3.875,-1.25) 10(-3.875,-1.75) 11(-3.875,-2.25) 12(-3.875,-2.75) 25(3.875,-2.75) 26(3.875,-2.25) 27(3.875,-1.75) 28(3.875,-1.25) 29(3.875,-0.75) 30(3.875,-0.25) 31(3.875,0.25) 32(3.875,0.75) 33(3.875,1.25) 34(3.875,1.75) 35(3.875,2.25) 36(3.875,2.75)
  rrect25% 0.27x0.96 smd: 13(-2.75,-3.875) 14(-2.25,-3.875) 15(-1.75,-3.875) 16(-1.25,-3.875) 17(-0.75,-3.875) 18(-0.25,-3.875) 19(0.25,-3.875) 20(0.75,-3.875) 21(1.25,-3.875) 22(1.75,-3.875) 23(2.25,-3.875) 24(2.75,-3.875) 37(2.75,3.875) 38(2.25,3.875) 39(1.75,3.875) 40(1.25,3.875) 41(0.75,3.875) 42(0.25,3.875) 43(-0.25,3.875) 44(-0.75,3.875) 45(-1.25,3.875) 46(-1.75,3.875) 47(-2.25,3.875) 48(-2.75,3.875)
  rect 6.2x6.2 smd paste-2.445: 49(0,0)
  silkscreen extent -5.13,-4 4,4, body extent -4,-3.98 4,4.02, height 0.89
GCT_USB4105-GF-A [mm]
  rect 0.6x1.15 smd: A1_B12(-3.2,4.755) A4_B9(-2.4,4.755) B1_A12(3.2,4.755) B4_A9(2.4,4.755)
  rect 0.3x1.15 smd: A5(-1.25,4.755) A6(-0.25,4.755) A7(0.25,4.755) A8(1.25,4.755) B5(1.75,4.755) B6(0.75,4.755) B7(-0.75,4.755) B8(-1.75,4.755)
  oval 1x2.1 hole 0.6 slot 1.7 at 90 deg: SH1(-4.32,4.18) SH2(4.32,4.18)
  rrect50% 1x1.8 hole 0.6 slot 1.4 at 90 deg: SH3(-4.32,0) SH4(4.32,0)
  round 0.65 hole 0.65 unplated: ""(-2.89,3.68) ""(2.89,3.68)
  silkscreen extent -4.47,1.4 4.47,2.65, body extent -4.48,-2.63 4.46,5.08, height 3.31
IND_SRP4020TA-2R2M [mm]
  rect 1.5x2.4 smd: 1(-1.85,0) 2(1.85,0)
  silkscreen extent -2.22,-2.03 2.22,2.03, body extent -2.22,-2.03 2.22,2.03, height 2
LED0603 [mm]
  rect 0.8x0.8 smd: 1(-0.8,0) 2(0.8,0)
  silkscreen extent -1.78,-0.65 1.45,0.94, body extent -0.85,-0.45 0.85,0.45, height 0.9
LED_0402 [mil]
  rect 30x26 smd paste+0 mask+0: 1(-21.5,0) 2(21.5,0)
  silkscreen extent -64,-18 45,19, body extent -20,-12 20,12, height 12
MAX20810AFE [mm]
  rect 1.15x2.9 smd: 1(-1.875,1.425)
  rect 1.15x0.3 smd: 2(-1.875,-0.375) 3(-1.875,-0.875) 4(-1.875,-1.375) 5(-1.875,-1.875) 12(1.875,-1.875) 13(1.875,-1.375) 14(1.875,-0.875)
  rect 1.15x1.35 smd: 6(-1.875,-2.9) 11(1.875,-2.9)
  rect 0.4x1.35 smd: 7(-0.9,-2.9) 8(-0.3,-2.9) 9(0.3,-2.9) 10(0.9,-2.9)
  rect 2.25x0.3 smd: 15(1.325,-0.2)
  rect 1.15x2.25 smd: 16(1.875,1.425)
  rect 1.1x0.3 smd: 17(-0.75,2.725) 18(-0.75,2.075) 19(-0.75,1.425) 20(-0.75,0.775) 21(-0.75,0.125) 22(0.75,0.45) 23(0.75,1.1) 24(0.75,1.75) 25(0.75,2.4)
  silkscreen extent -2.9,1.38 2.15,3.27, body extent -2.15,-3.23 2.15,3.32, height 0.69
OLED_DISPLAY [mm]
  rect 1.37x1.37 hole 1.02: 1(0,0)
  round 1.37 hole 1.02: 2(0,2.54) 3(0,5.08) 4(0,7.62)
  silkscreen extent -1.6,-1.6 1.6,9.22, body extent -1.27,-2.19 36.73,9.81, height 5.59
QFN50P700X700X100-49N-D [mm]
  rect 0.9x0.3 smd: 1(-3.45,2.75) 2(-3.45,2.25) 3(-3.45,1.75) 4(-3.45,1.25) 5(-3.45,0.75) 6(-3.45,0.25) 7(-3.45,-0.25) 8(-3.45,-0.75) 9(-3.45,-1.25) 10(-3.45,-1.75) 11(-3.45,-2.25) 12(-3.45,-2.75) 25(3.45,-2.75) 26(3.45,-2.25) 27(3.45,-1.75) 28(3.45,-1.25) 29(3.45,-0.75) 30(3.45,-0.25) 31(3.45,0.25) 32(3.45,0.75) 33(3.45,1.25) 34(3.45,1.75) 35(3.45,2.25) 36(3.45,2.75)
  rect 0.3x0.9 smd: 13(-2.75,-3.45) 14(-2.25,-3.45) 15(-1.75,-3.45) 16(-1.25,-3.45) 17(-0.75,-3.45) 18(-0.25,-3.45) 19(0.25,-3.45) 20(0.75,-3.45) 21(1.25,-3.45) 22(1.75,-3.45) 23(2.25,-3.45) 24(2.75,-3.45) 37(2.75,3.45) 38(2.25,3.45) 39(1.75,3.45) 40(1.25,3.45) 41(0.75,3.45) 42(0.25,3.45) 43(-0.25,3.45) 44(-0.75,3.45) 45(-1.25,3.45) 46(-1.75,3.45) 47(-2.25,3.45) 48(-2.75,3.45)
  rect 4.2x4.2 smd: 49(0,0)
  silkscreen extent -4.02,3.38 -3.77,3.62, body extent -3.5,-3.5 3.5,3.5, height 1
SAMTEC_ESQ-126-39-G-D [mm]
  rect 1.37x1.37 hole 1.02: 01(0,0)
  round 1.37 hole 1.02: 02(0,-2.54) 03(-2.54,0) 04(-2.54,-2.54) 05(-5.08,0) 06(-5.08,-2.54) 07(-7.62,0) 08(-7.62,-2.54) 09(-10.16,0) 10(-10.16,-2.54) 11(-12.7,0) 12(-12.7,-2.54) 13(-15.24,0) 14(-15.24,-2.54) 15(-17.78,0) 16(-17.78,-2.54) 17(-20.32,0) 18(-20.32,-2.54) 19(-22.86,0) 20(-22.86,-2.54) 21(-25.4,0) 22(-25.4,-2.54) 23(-27.94,0) 24(-27.94,-2.54) 25(-30.48,0) 26(-30.48,-2.54) 27(-33.02,0) 28(-33.02,-2.54) 29(-35.56,0) 30(-35.56,-2.54) 31(-38.1,0) 32(-38.1,-2.54) 33(-40.64,0) 34(-40.64,-2.54) 35(-43.18,0) 36(-43.18,-2.54) 37(-45.72,0) 38(-45.72,-2.54) 39(-48.26,0) 40(-48.26,-2.54) 41(-50.8,0) 42(-50.8,-2.54) 43(-53.34,0) 44(-53.34,-2.54) 45(-55.88,0) 46(-55.88,-2.54) 47(-58.42,0) 48(-58.42,-2.54) 49(-60.96,0) 50(-60.96,-2.54) 51(-63.5,0) 52(-63.5,-2.54)
  silkscreen extent -65.03,-3.74 2.27,1.2, body extent -65.02,-3.81 1.52,1.27, height 11.05
SAMTEC_FTSH-107-01-L-DV-K-A [mm]
  rect 0.74x2.5 smd: 01(-3.81,-2.035) 02(-3.81,2.035) 03(-2.54,-2.035) 04(-2.54,2.035) 05(-1.27,-2.035) 06(-1.27,2.035) 07(0,-2.035) 08(0,2.035) 09(1.27,-2.035) 10(1.27,2.035) 11(2.54,-2.035) 12(2.54,2.035) 13(3.81,-2.035) 14(3.81,2.035)
  round 1.02 hole 1.02 unplated: ""(-3.175,0) ""(3.175,0)
  silkscreen extent -5.16,-2.13 4.53,1.72, body extent -4.44,-2.92 4.44,2.92, height 6.1
SKRPADE010_AAL [mil]
  rect 41x26 smd paste+0 mask+0: 1(-81.69,42.32) 2(-81.69,-42.32) 3(81.69,42.32) 4(81.69,-42.32)
  silkscreen extent -136,-68 88,68, body extent -91,-63 91,63, height 98
SN74AXC1T45DBVR [mm]
  rect 1.1x0.6 smd mask+0.07: 1(-1.3,0.95) 2(-1.3,0) 3(-1.3,-0.95) 4(1.3,-0.95) 5(1.3,0) 6(1.3,0.95)
  silkscreen extent -2.48,-1.64 2.13,1.64, body extent -1.4,-1.45 1.4,1.45, height 1.45
SON127P800X600X80-9N [mm]
  rect 0.94x0.44 smd: 1(-3.895,1.905) 2(-3.895,0.635) 3(-3.895,-0.635) 4(-3.895,-1.905) 5(3.895,-1.905) 6(3.895,-0.635) 7(3.895,0.635) 8(3.895,1.905)
  rect 3.4x4.3 smd paste-3: 9(0,0)
  silkscreen extent -4.6,-3 4,3, body extent -4,-3 4,3, height 0.8
TEST_POINT [mil]
  round 60 smd paste-23 mask+1.97: 1(0,0)
  silkscreen extent -39,-39 39,39
UFBGA144-10x10mm [mil]
  round 14 smd paste+0 mask+0: A1(-173.23,173.23) A2(-141.73,173.23) A3(-110.24,173.23) A4(-78.74,173.23) A5(-47.24,173.23) A6(-15.75,173.23) A7(15.75,173.23) A8(47.24,173.23) A9(78.74,173.23) A10(110.24,173.23) A11(141.73,173.23) A12(173.23,173.23) B1(-173.23,141.73) B2(-141.73,141.73) B3(-110.24,141.73) B4(-78.74,141.73) B5(-47.24,141.73) B6(-15.75,141.73) B7(15.75,141.73) B8(47.24,141.73) B9(78.74,141.73) B10(110.24,141.73) B11(141.73,141.73) B12(173.23,141.73) C1(-173.23,110.24) C2(-141.73,110.24) C3(-110.24,110.24) C4(-78.74,110.24) C5(-47.24,110.24) C6(-15.75,110.24) C7(15.75,110.24) C8(47.24,110.24) C9(78.74,110.24) C10(110.24,110.24) C11(141.73,110.24) C12(173.23,110.24) D1(-173.23,78.74) D2(-141.73,78.74) D3(-110.24,78.74) D4(-78.74,78.74) D5(-47.24,78.74) D6(-15.75,78.74) D7(15.75,78.74) D8(47.24,78.74) D9(78.74,78.74) D10(110.24,78.74) D11(141.73,78.74) D12(173.23,78.74) E1(-173.23,47.24) E2(-141.73,47.24) E3(-110.24,47.24) E4(-78.74,47.24) E5(-47.24,47.24) E6(-15.75,47.24) E7(15.75,47.24) E8(47.24,47.24) E9(78.74,47.24) E10(110.24,47.24) E11(141.73,47.24) E12(173.23,47.24) F1(-173.23,15.75) F2(-141.73,15.75) F3(-110.24,15.75) F4(-78.74,15.75) F5(-47.24,15.75) F6(-15.75,15.75) F7(15.75,15.75) F8(47.24,15.75) F9(78.74,15.75) F10(110.24,15.75) F11(141.73,15.75) F12(173.23,15.75) G1(-173.23,-15.75) G2(-141.73,-15.75) G3(-110.24,-15.75) G4(-78.74,-15.75) G5(-47.24,-15.75) G6(-15.75,-15.75) G7(15.75,-15.75) G8(47.24,-15.75) G9(78.74,-15.75) G10(110.24,-15.75) G11(141.73,-15.75) G12(173.23,-15.75) H1(-173.23,-47.24) H2(-141.73,-47.24) H3(-110.24,-47.24) H4(-78.74,-47.24) H5(-47.24,-47.24) H6(-15.75,-47.24) H7(15.75,-47.24) H8(47.24,-47.24) H9(78.74,-47.24) H10(110.24,-47.24) H11(141.73,-47.24) H12(173.23,-47.24) J1(-173.23,-78.74) J2(-141.73,-78.74) J3(-110.24,-78.74) J4(-78.74,-78.74) J5(-47.24,-78.74) J6(-15.75,-78.74) J7(15.75,-78.74) J8(47.24,-78.74) J9(78.74,-78.74) J10(110.24,-78.74) J11(141.73,-78.74) J12(173.23,-78.74) K1(-173.23,-110.24) K2(-141.73,-110.24) K3(-110.24,-110.24) K4(-78.74,-110.24) K5(-47.24,-110.24) K6(-15.75,-110.24) K7(15.75,-110.24) K8(47.24,-110.24) K9(78.74,-110.24) K10(110.24,-110.24) K11(141.73,-110.24) K12(173.23,-110.24) L1(-173.23,-141.73) L2(-141.73,-141.73) L3(-110.24,-141.73) L4(-78.74,-141.73) L5(-47.24,-141.73) L6(-15.75,-141.73) L7(15.75,-141.73) L8(47.24,-141.73) L9(78.74,-141.73) L10(110.24,-141.73) L11(141.73,-141.73) L12(173.23,-141.73) M1(-173.23,-173.23) M2(-141.73,-173.23) M3(-110.24,-173.23) M4(-78.74,-173.23) M5(-47.24,-173.23) M6(-15.75,-173.23) M7(15.75,-173.23) M8(47.24,-173.23) M9(78.74,-173.23) M10(110.24,-173.23) M11(141.73,-173.23) M12(173.23,-173.23)
  silkscreen extent -208,-208 208,208, body extent -198,-198 198,198, height 24
WE-HCI_1365 [mm]
  rect 4.5x5 smd: 1(-5.25,0) 2(5.25,0)
  silkscreen extent -6.5,-6.5 6.5,6.5, body extent -6.5,-6.4 6.5,6.4, height 6.17
XTAL_ABM8-12.000MHZ-B2-T [mm]
  rect 1.05x1.3 smd: 1(-0.875,1.15) 2(-0.875,-1.15) 3(0.875,-1.15) 4(0.875,1.15)
  silkscreen extent -1.98,-2.03 1.65,2.03, body extent -1.25,-1.6 1.25,1.6, height 0.8
XTAL_ECS-160-8-33Q-JES-TR [mm]
  rect 1.3x1.1 smd: 1(-1.15,-0.9) 2(1.15,-0.9) 3(1.15,0.9) 4(-1.15,0.9)
  silkscreen extent -2.45,-1.7 2.05,1.7, body extent -1.6,-1.25 1.6,1.25, height 0.8
"XTAL_NX3215SA_NDK-M - duplicate" [mil]
  rect 34x65 smd paste+0 mask+0: 1(-50,0) 2(50,0)
  silkscreen extent -115,-36 21,36, body extent -65,-31 65,31, height 35